# Altium PCB STM32F401RCT6最小系统板.PcbDoc
Units mil, origin at the board's own origin, x right, y up, seen from the top; angles counter-clockwise.
Board outline 2560 x 2610 mil, 2 copper layers (Top Layer, Bottom Layer); 73 components, 77 nets, 277 pads, 58 vias.
Unrouted connection lines stored in the file: 63.
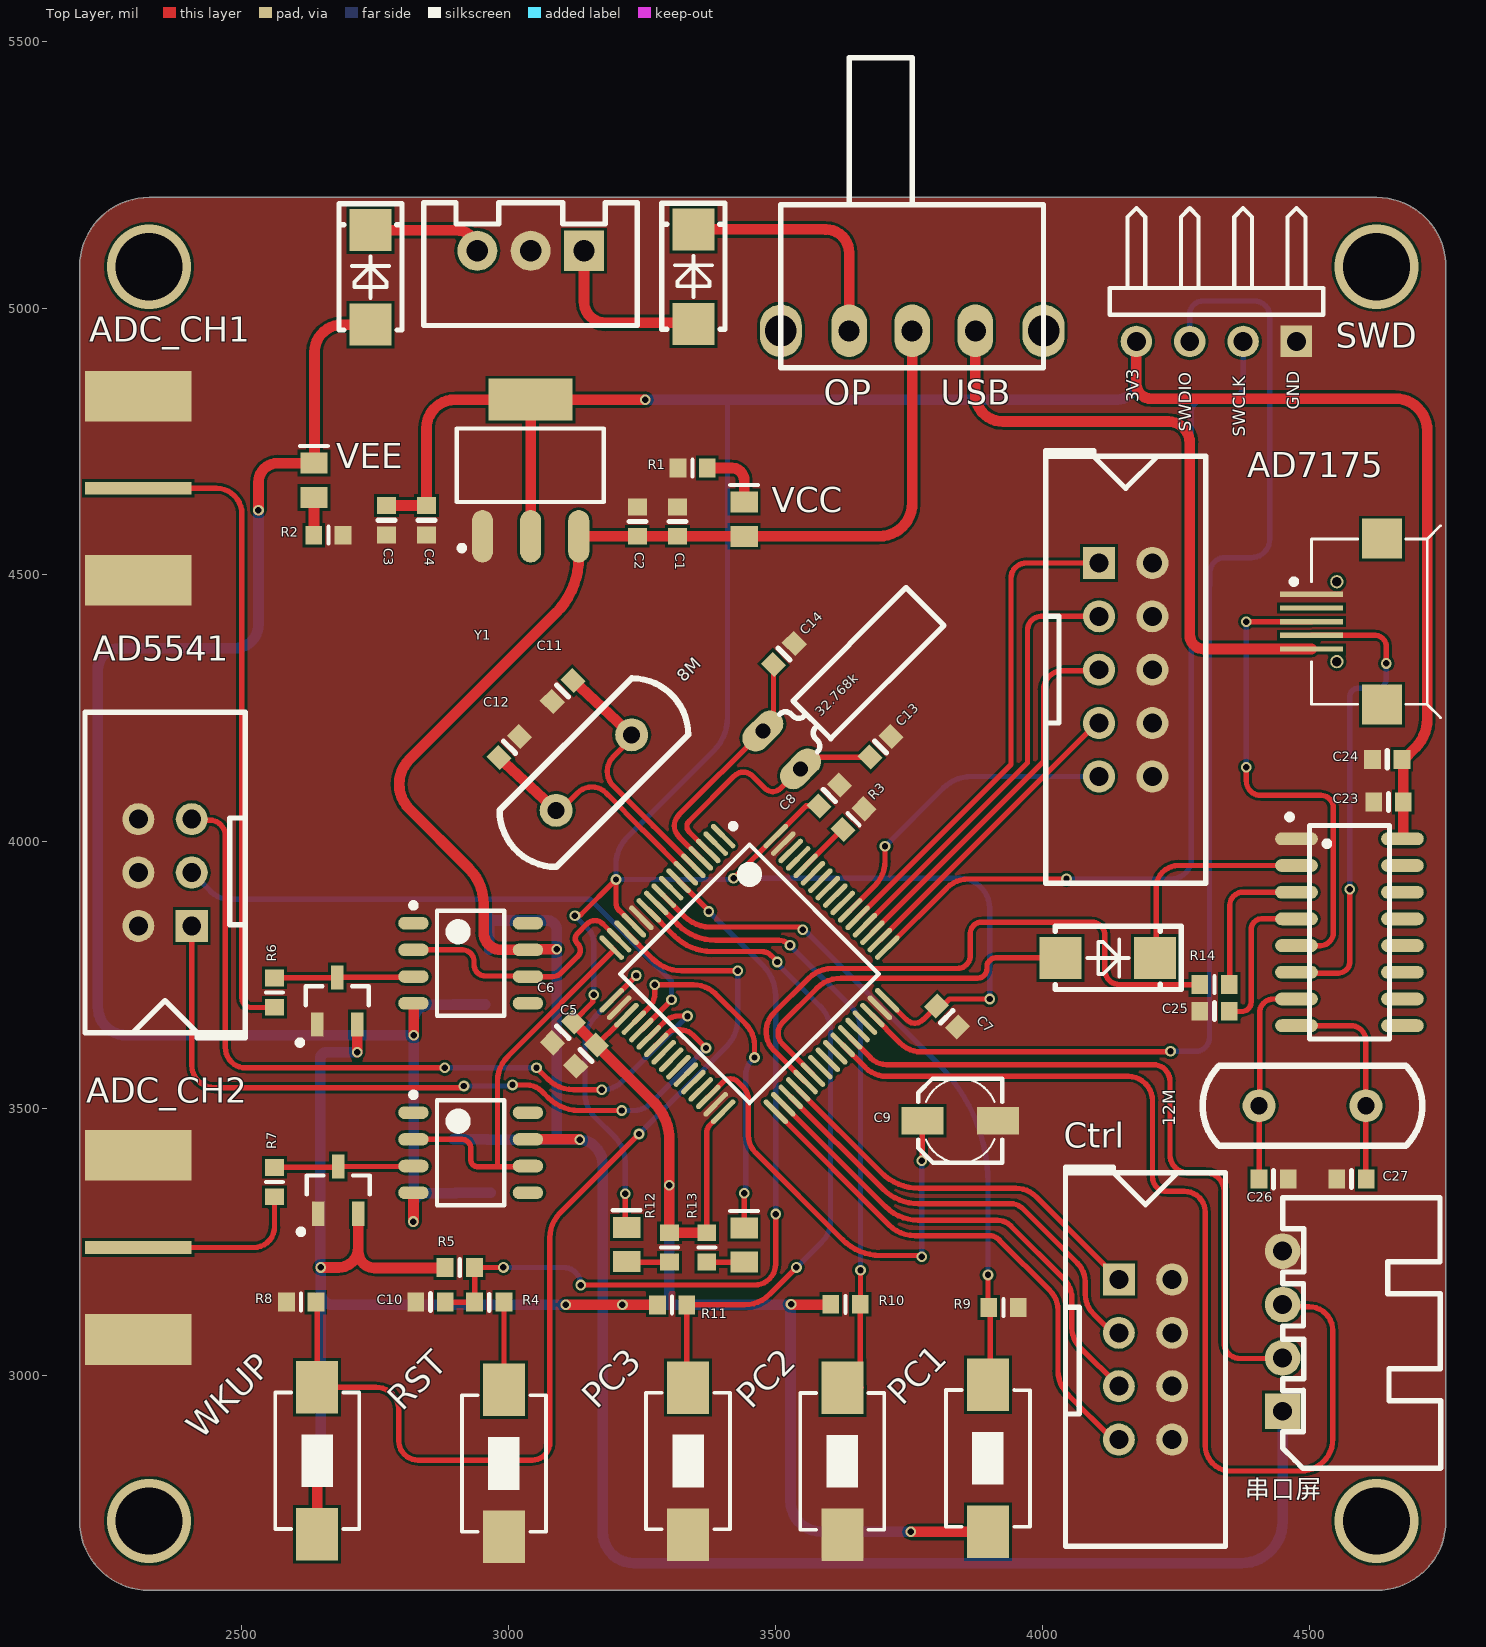
[diagram p0: Top Layer view]
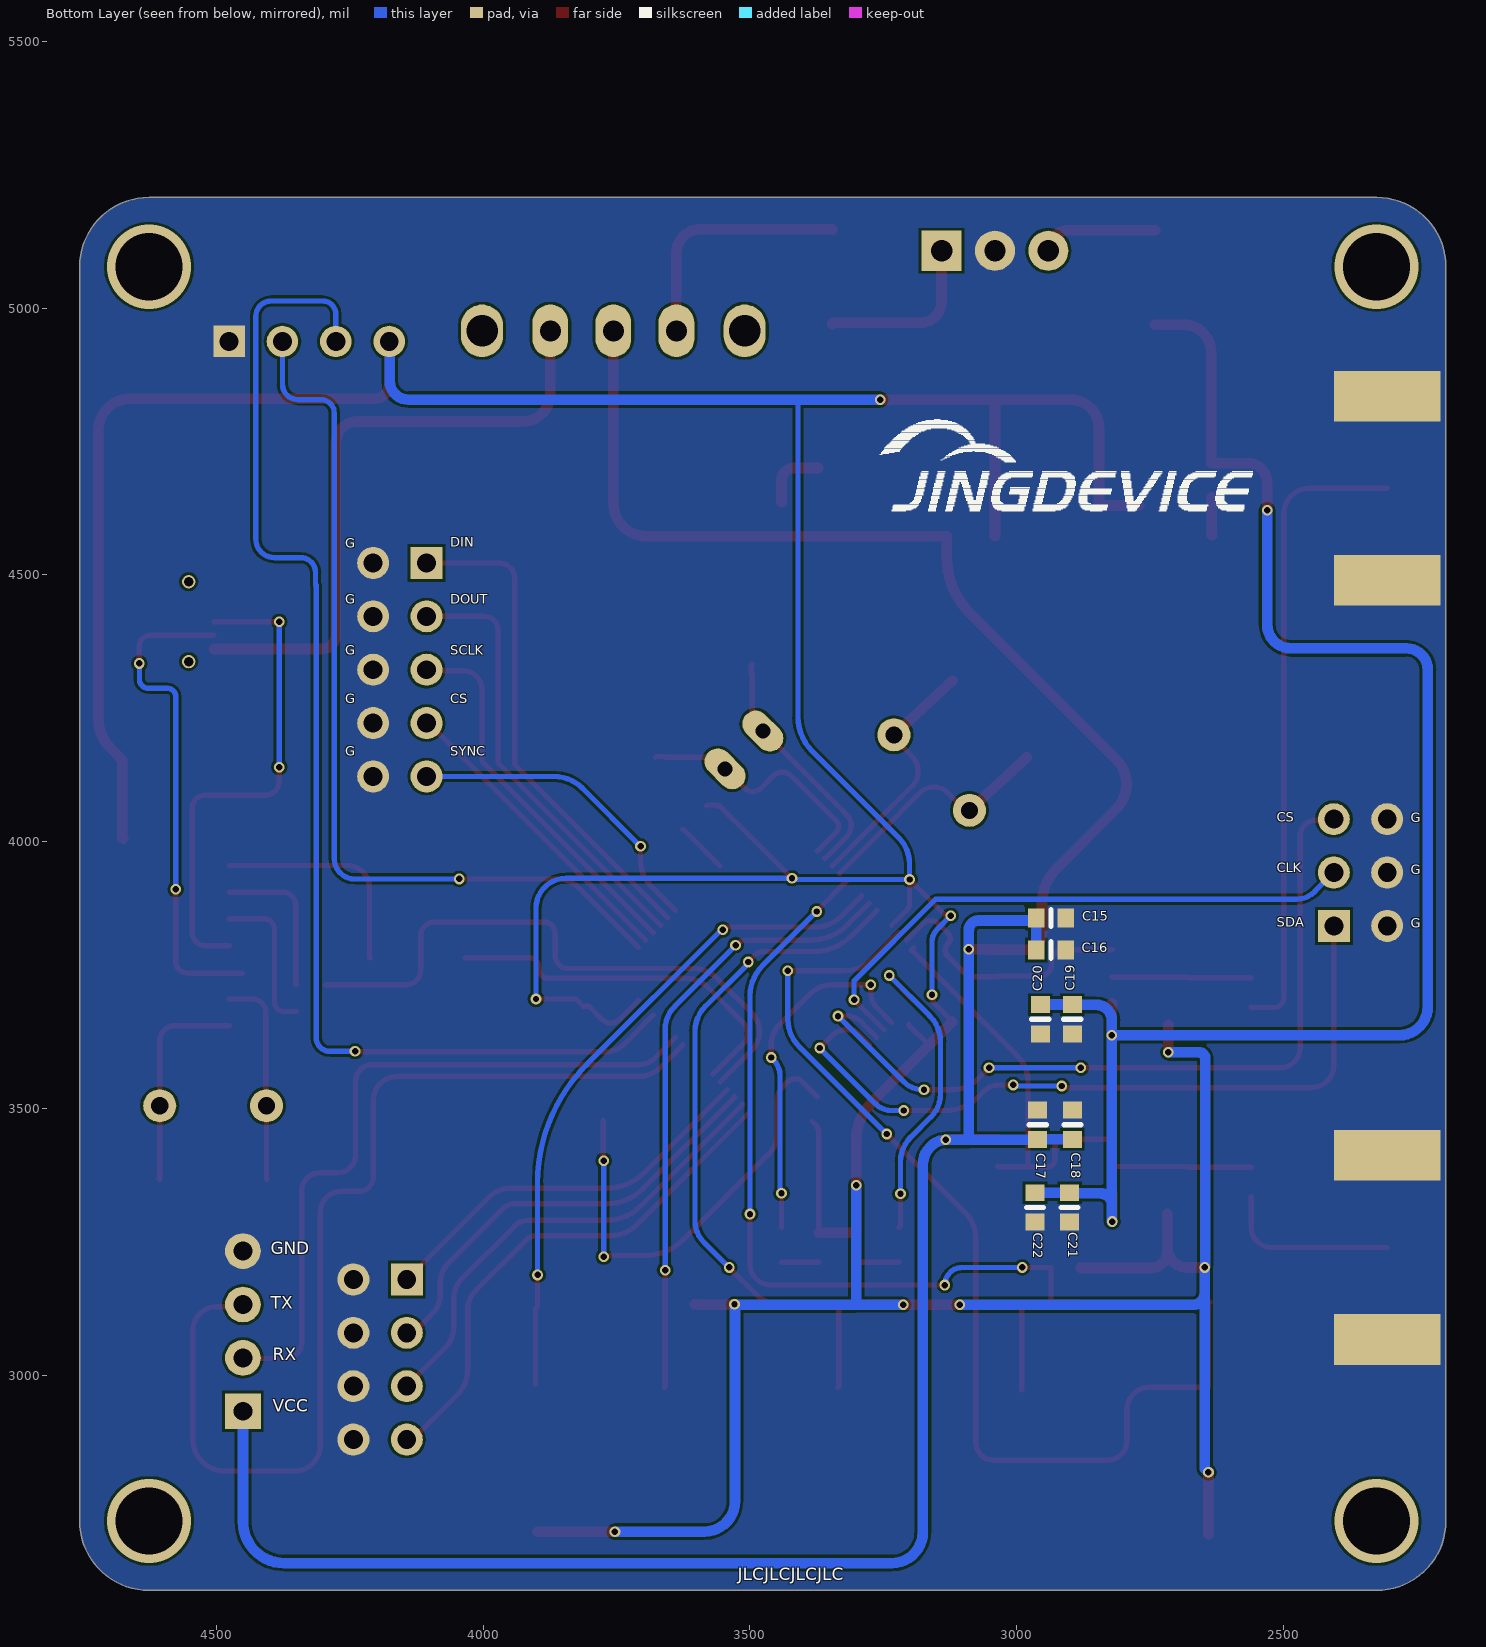
[diagram p1: Bottom Layer view, seen from below]
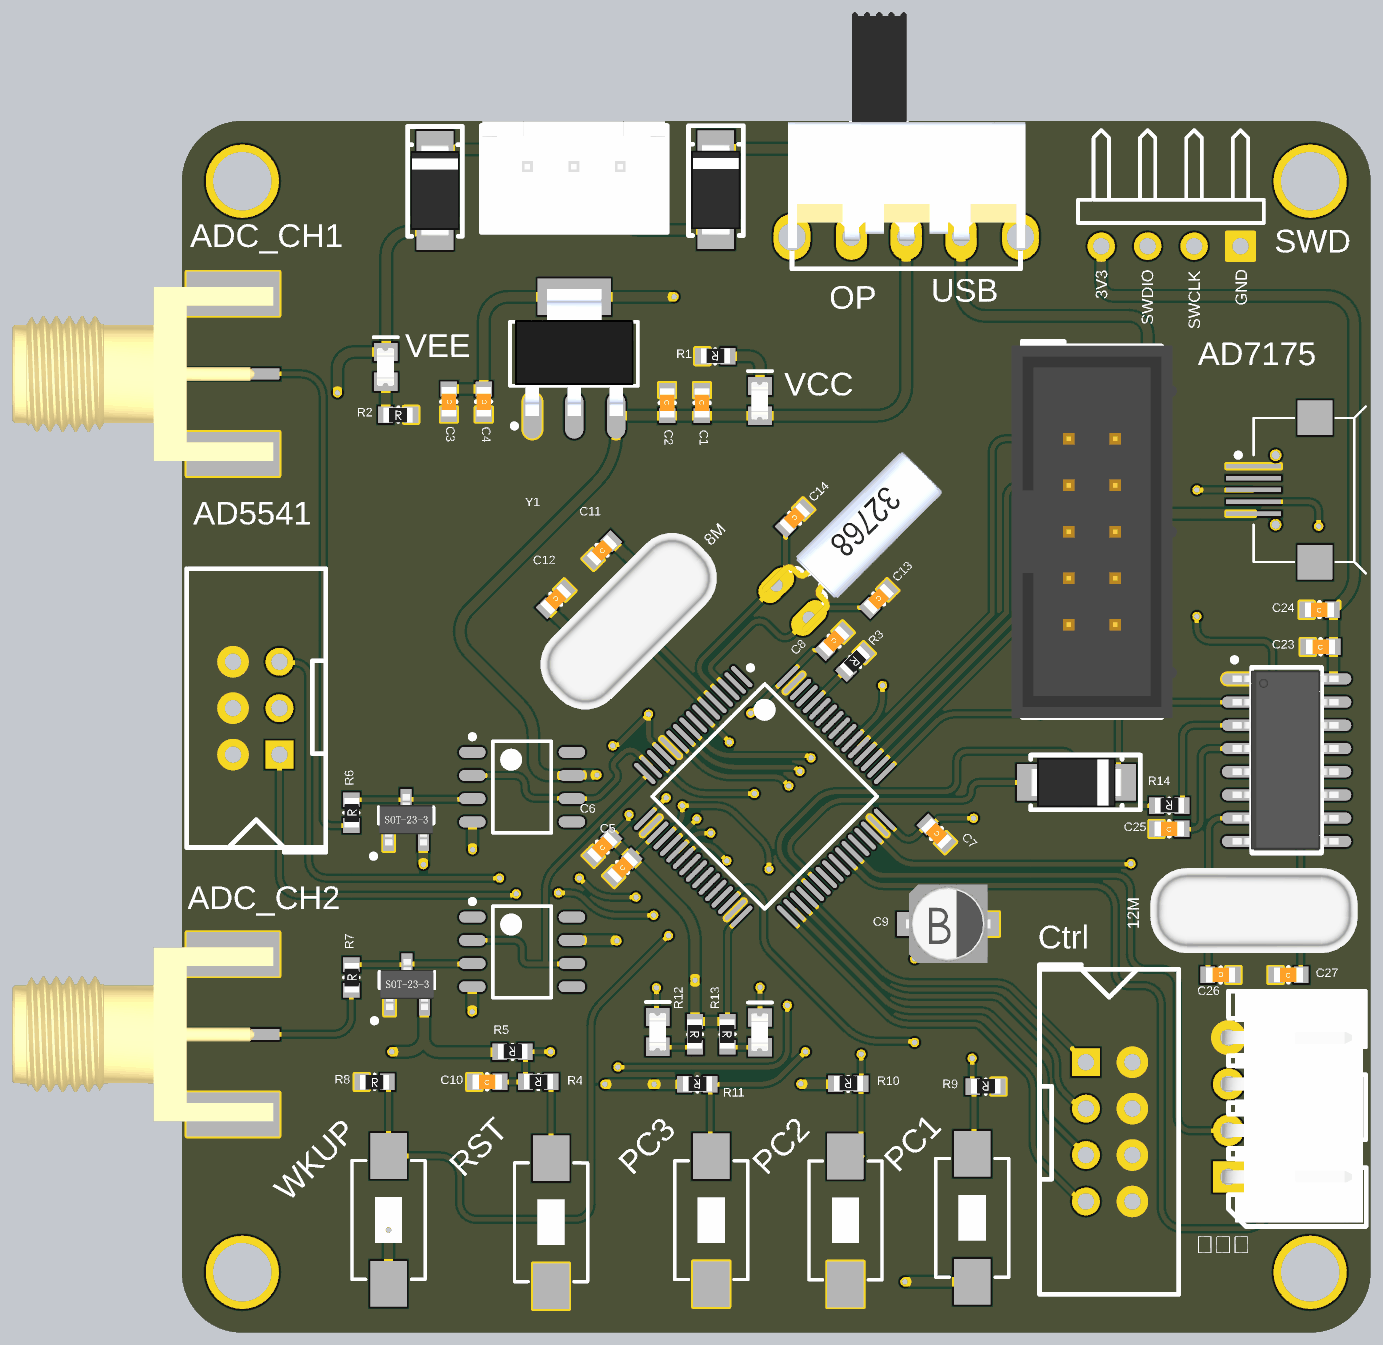
[diagram p2: 3D render of the assembled board from above, using the file's embedded part models]
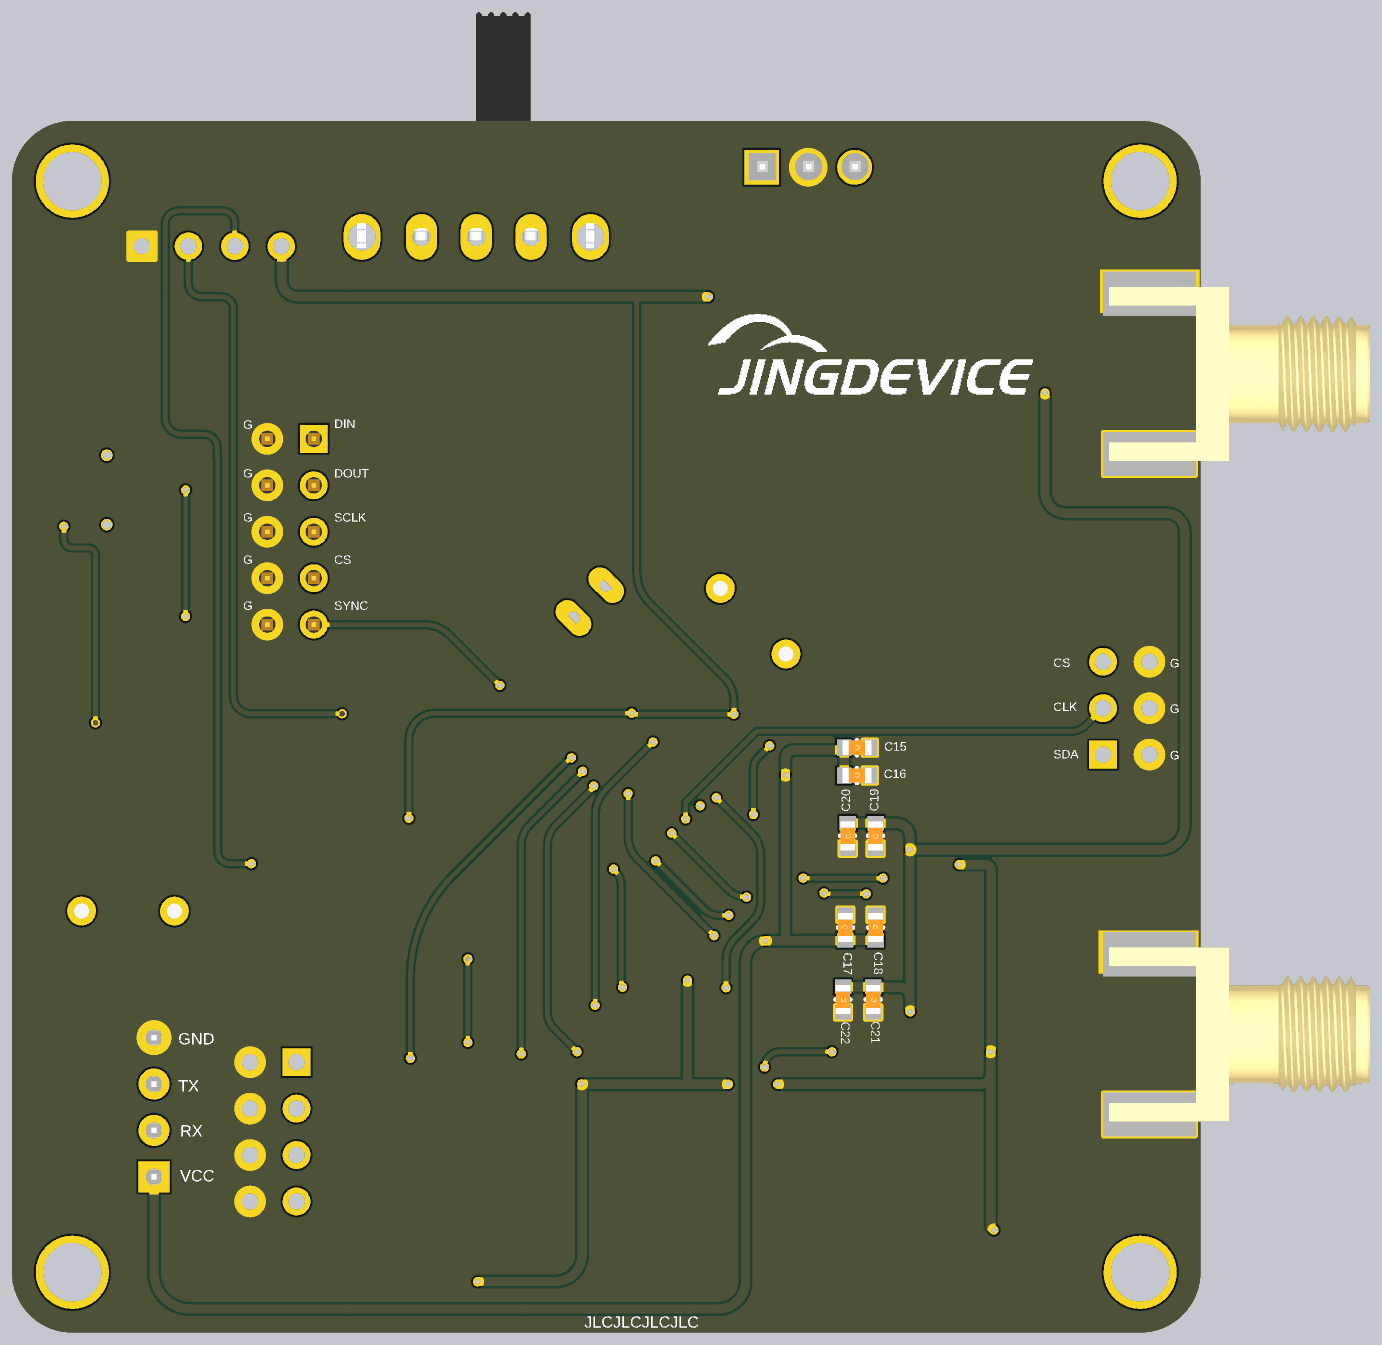
[diagram p3: 3D render of the assembled board from below, using the file's embedded part models]

## Layer stack, top to bottom
Top Solder: solder mask 0.4, Solder Resist, Dk 3.5
Top Layer: signal copper 1.4
Dielectric 1: dielectric 12.6, FR-4, Dk 4.8
Bottom Layer: signal copper 1.4
Bottom Solder: solder mask 0.4, Solder Resist, Dk 3.5

## Board outline
2325.94,2597.49 cw(c2325.94,2727.49) 2195.94,2727.49 2195.94,5077.49 cw(c2325.94,5077.49) 2325.94,5207.49 4625.94,5207.49 cw(c4625.94,5077.49) 4755.94,5077.49 4755.94,2727.49 cw(c4625.94,2727.49) 4625.94,2597.49

## Design rules (kind name [scope] priority, off if disabled: settings)
Clearance [All] p1: gap=5 ignorepadtopadclearanceinfootprint=FALSE except(0: Arc-Hole Track-Hole SMDPad-Hole THPad-Hole Via-Hole Fill-Hole Poly-Hole Region-Hole Text-Hole)
PolygonConnect [All] p1: connectstyle=Direct reliefconductorwidth=10 reliefentries=4 polygonreliefangle="90 Angle" airgapwidth=10
RoutingVias [All] p1: holewidth=28 width=50 viastyle="Through Hole" minholewidth=28 minwidth=50 maxholewidth=28 maxwidth=50
SolderMaskExpansion [All] p1: expansion=4 istentingtop=FALSE
Width [All] p1: maxlimit=100 minlimit=10 preferedwidth=10
30 further rules are at their usual default settings.

## Classes and differential pairs
component class USB-TTL: C23 C24 C25 C26 C27 R14
component class STM32F401RCT6最小系统板: AD5541 AD7175 C1 C2 C3 C4 C5 C6 C7 C8 C9 C10 C11 C12 C13 C14 R1 R2 R3 R4 R5 RST SWD Y1 串口屏
component class Keys: R8 R9 R10 R11 R12 R13 WKUP
component class Analog: ADC_CH1 ADC_CH2 C15 C16 C17 C18 C19 C20 C21 C22 R6 R7

## Components (designator, comment, footprint, x,y, rotation, side; value= is the part's Value field where it differs from the comment)
AD5541 "DC-6P" DC-6P 2350.94,4027.49 r90 top
AD7175 "DC-10P" DC-10P 4105.94,4322.49 r90 top
ADC_CH1 "SMA" SMA1 2305.94,4662.49 r0 top
ADC_CH2 "SMA" SMA1 2305.94,3239.99 r0 top
C1 "Cap-S" C0603-L 3315.94,4600.05 r270 top value=100nF
C2 "Cap-S" C0603-L 3240.94,4600.05 r270 top value=10uF
C3 "Cap-S" C0603-L 2770.94,4602.49 r90 top value=100nF
C4 "Cap-S" C0603-L 2845.94,4602.49 r90 top value=10uF
C5 "Cap-S" C0603-L 3144.94,3599.49 r45 top value=100nF
C6 "Cap-S" C0603-L 3101.45,3643.01 r45 top value=10uF
C7 "Cap-S" C0603-L 3820.94,3672.49 r135 top value=100nF
C8 "Cap-S" C0603-L 3600.43,4086.98 r225 top value=10uF
C9 "C" C-RB-SD4 3845.94,3477.49 r0 top value=4.7uF
C10 "Cap-S" C0603-L 2853.38,3137.49 r0 top value=100nF
C11 "Cap-S" C0603-L 3100.94,4282.49 r45 top value=20pF
C12 "Cap-S" C0603-L 3000.94,4177.49 r225 top value=20pF
C13 "Cap-S" C0603-L 3696.45,4178.01 r225 top value=10pF
C14 "Cap-S" C0603-L 3515.43,4351.98 r225 top value=10pF
C15 "Cap-S" C0603-L 2935.94,3857.49 r0 bottom value=100nF
C16 "Cap-S" C0603-L 2935.94,3797.49 r0 bottom value=10uF
C17 "Cap-S" C0603-L 2960.94,3470.05 r270 bottom value=100nF
C18 "Cap-S" C0603-L 2895.94,3470.05 r270 bottom value=10uF
C19 "Cap-S" C0603-L 2895.94,3667.49 r90 bottom value=100nF
C20 "Cap-S" C0603-L 2955.94,3667.49 r90 bottom value=10uF
C21 "Cap-S" C0603-L 2900.94,3314.93 r90 bottom value=100nF
C22 "Cap-S" C0603-L 2965.94,3314.93 r90 bottom value=10uF
C23 "Cap-S" C0603-L 4648.38,4074.49 r0 top value=100nF
C24 "Cap-S" C0603-L 4645.94,4154.49 r0 top value=10uF
C25 "Cap-S" C0603-L 4322.38,3682.49 r0 top value=10nF
C26 "Cap-S" C0603-L 4433,3368 r180 top value=22pF
C27 "Cap-S" C0603-L 4579,3368 r0 top value=22pF
Ctrl "DC-8P" DC-8P 4201,3038 r270 top
D1 "D" D-SMA 2740.94,5057.49 r90 top
D2 "D" D-SMA 3345.94,5058.91 r90 top
D3 "D" D-SMA 4122.36,3782.49 r0 top
J1 "Power-3P" SIPA03 3140.94,5107.49 r180 top
LED3 "LED" Led-0805_L 3220.94,3245.49 r90 top
LED4 "LED" Led-0805_L 3440.94,3244.49 r90 top
PC1 "SW-PB2" SW-PB2-SMD 3898,2847 r180 top (schematic designator S1)
PC2 "SW-PB2" SW-PB2-SMD 3625,2837 r0 top (schematic designator S2)
PC3 "SW-PB2" SW-PB2-SMD 3335.94,2837.49 r0 top (schematic designator S3)
R1 "R" R0603-L 3344.38,4700.49 r180 top value=1K
R2 "R" R0603-L 2661.94,4574.49 r0 top value=1K
R3 "R" R0603-L 3645.94,4042.49 r225 top value=10K
R4 "R" R0603-L 2963.5,3137.49 r180 top value=100R
R5 "R" R0603-L 2907.94,3202.49 r180 top value=10K
R6 "R" R0603-L 2560.94,3717.49 r90 top value=100R
R7 "R" R0603-L 2560.94,3362.49 r90 top value=100R
R8 "R" R0603-L 2610.94,3137.49 r0 top value=1K
R9 "R" R0603-L 3926.94,3127.49 r180 top value=1K
R10 "R" R0603-L 3630.94,3133.49 r180 top value=1K
R11 "R" R0603-L 3305.94,3132.49 r180 top value=1K
R12 "R" R0603-L 3300.94,3240.05 r270 top value=1K
R13 "R" R0603-L 3370.94,3240.05 r270 top value=1K
R14 "R" R0603-L 4322.38,3732.49 r180 top value=100
RST "SW-PB2" SW-PB2-SMD 2990.94,2837.49 r180 top
SWD "Header 4H" HDR1X4H 4475.94,4937.49 r180 top
U1 "STM32F401RCT6" STM-LQFP64_L 3450.94,3752.49 r315 top
U3 "OPA192" SOIC127P600X175-8N 2928.66,3772.49 r0 top
U4 "OPA192" SOIC127P600X175-8N 2928.66,3417.49 r0 top
U5 "BAT54S" SOT-23-3 2678.95,3702 r90 top
U6 "BAT54S" SOT-23-3 2680.94,3347.49 r90 top
U7 "CH340G" SOP-16 4575.94,3839.49 r0 top
U10 "AMS1117" SOT-223 3040.94,4697.49 r0 top
USB "USB_Mini/Micro" USB_Micro 4720.94,4412.49 r0 top
USB "SW-SPDT" SW-SPDT 3755.94,4957.49 r90 top (schematic designator POWER)
VCC "LED" Led-0805_L 3440.94,4604.49 r90 top (schematic designator LED1)
VEE "LED" Led-0805_L 2634.94,4677.49 r90 top (schematic designator LED2)
WKUP "SW-PB2" SW-PB2-SMD 2640.94,2842.49 r180 top
Y1 "XTAL" XTAL-PB2-DIP 3160.94,4142.49 r45 top value=8M
Y2 "XTAL" XTAL-32768 3475.94,4207.49 r315 top value=32.768K
Y3 "XTAL" XTAL-PB2-DIP 4515.94,3513.49 r0 top value=12M
串口屏 "Header 4" XH2.54-WI-4P 4450,3083 r90 top

## Footprints (in the part's own frame and the unit in brackets; to place one, negate y for a bottom-side part, rotate by r counter-clockwise, add the part's x,y. Pads: shape width x height; smd on the part's side, far side on the other; paste and mask are expansions set on the pad)
C0603-L [mm] "贴片电容0603 高密度"
  rect 0.8x0.9 smd: 1(-0.7,0) 2(0.7,0)
  silkscreen extent 0,-0.39 0,0.41, body extent -0.8,-0.4 0.8,0.41, height 0.88
C-RB-SD4 [mm] "贴片铝电解"
  rect 2x1.3 smd: 1(-1.8,0) 2(1.8,0)
  silkscreen extent -2,-2 2,2, body extent -2.29,-2.14 2.31,2.16, height 5.2
D-SMA [mm]
  rect 2x2 smd: 1(-2.25,0) 2(2.25,0)
  silkscreen extent -2.5,-1.5 3.5,1.5, body extent -2.5,-1.35 2.5,1.35, height 2.15
DC-6P [mil]
  rect 60x60 hole 35.43: 1(-185,-55)
  round 60 hole 35.43: 2(-85,-55) 3(15,-55) 4(15,45) 5(-85,45) 6(-185,45)
  silkscreen extent -395,-155 215,145, body extent -386,-156 216,145, height 236
DC-8P [mil]
  rect 60x60 hole 35.43: 1(-142,-58)
  round 60 hole 35.43: 2(-42,-58) 3(58,-58) 4(158,-58) 5(158,42) 6(58,42) 7(-42,42) 8(-142,42)
  silkscreen extent -352,-158 358,142, body extent -342,-159 358,142, height 236
DC-10P [mil]
  rect 60x60 hole 35.43: 1(200,0)
  round 60 hole 35.43: 2(100,0) 3(0,0) 4(-100,0) 5(-200,0) 6(-200,-100) 7(-100,-100) 8(0,-100) 9(100,-100) 10(200,-100)
  silkscreen extent -400,-200 410,100, body extent -401,-233 401,123, height 357
HDR1X4H [mm] "Connector; Header; 4 Position; Right Angle"
  rect 1.5x1.5 hole 0.9: 1(0,0)
  round 1.5 hole 0.9: 2(2.54,0) 3(5.08,0) 4(7.62,0)
  silkscreen extent -1.27,-6.35 8.89,-1.27
Led-0805_L [mm] "贴片LED0805-高密度"
  rect 1x1.3 smd: 1(-0.813,0) 2(0.813,0)
  silkscreen extent 1.63,-0.66 1.63,0.66, body extent -1.03,-0.44 1.03,0.47, height 0.85
R0603-L [mm] "贴片电阻0603 高密度"
  rect 0.8x0.9 smd: 1(-0.7,0) 2(0.7,0)
  silkscreen extent 0,-0.39 0,0.41, body extent -0.81,-0.43 0.79,0.39, height 0.53
SIPA03 [mil]
  rect 75x75 hole 40: 1(0,0)
  round 75 hole 40: 2(100,0) 3(200,0)
  silkscreen extent -100,-90 300,140, body extent -96,-99 298,137, height 276
SMA1 [mil]
  rect 200x24 smd: 1(0,0)
  rect 200x95 smd: 2(0,-172.5) 2(0,172.5)
  rect 200x95 smd far side: 2(0,-172.5)
  rect 200x95 smd far side mask+4: 2(0,172.5)
  body extent -475,-187 87,187, height 171
SOIC127P600X175-8N [mm] "SOIC, 8-Leads, Body 4.91x3.90mm, Pitch 1.27mm, IPC Medium Density"
  oval 1.45x0.6 smd: 1(-2.725,1.905) 2(-2.725,0.635) 3(-2.725,-0.635) 4(-2.725,-1.905) 5(2.725,-1.905) 6(2.725,-0.635) 7(2.725,0.635) 8(2.725,1.905)
  silkscreen extent -2.85,-2.5 1.6,2.88, body extent -2,-2.5 2,2.5, height 1.75
SOP-16 [mil]
  oval 80x24 smd: 1(-100,166.09) 2(-100,116.09) 3(-100,66.09) 4(-100,16.09) 5(-100,-33.91) 6(-100,-83.91) 7(-100,-133.91) 8(-100,-183.91) 9(98.5,-183.91) 10(98.5,-133.91) 11(98.5,-83.91) 12(98.5,-33.91) 13(98.5,16.09) 14(98.5,66.09) 15(98.5,116.09) 16(98.5,166.09)
  silkscreen extent -118,-209 74,212, body extent -117,-202 111,184, height 69
SOT-23-3 [mm]
  rect 1.15x0.6 smd: 1(-1.13,0.96) 2(1.12,0.01) 3(-1.13,-0.94)
  silkscreen extent -2.11,-1.49 0.69,1.91, body extent -1.4,-1.45 1.4,1.45, height 1.2
SOT-223 [mm]
  oval 1x2.5 smd: 1(-2.29,-3.175) 2(0,-3.175) 3(2.29,-3.175)
  rect 4x2 smd: 2(0,3.325)
  silkscreen extent -3.52,-3.86 3.48,1.96, body extent -3.25,-3.2 3.25,3.76, height 1.66
STM-LQFP64_L [mm] "Thin QFP, 64-Leads, Body 10x10mm, Pitch 0.5mm, IPC High Density"
  oval 1.55x0.25 smd: 1(-5.525,3.75) 2(-5.525,3.25) 3(-5.525,2.75) 4(-5.525,2.25) 5(-5.525,1.75) 6(-5.525,1.25) 7(-5.525,0.75) 8(-5.525,0.25) 9(-5.525,-0.25) 10(-5.525,-0.75) 11(-5.525,-1.25) 12(-5.525,-1.75) 13(-5.525,-2.25) 14(-5.525,-2.75) 15(-5.525,-3.25) 16(-5.525,-3.75) 33(5.525,-3.75) 34(5.525,-3.25) 35(5.525,-2.75) 36(5.525,-2.25) 37(5.525,-1.75) 38(5.525,-1.25) 39(5.525,-0.75) 40(5.525,-0.25) 41(5.525,0.25) 42(5.525,0.75) 43(5.525,1.25) 44(5.525,1.75) 45(5.525,2.25) 46(5.525,2.75) 47(5.525,3.25) 48(5.525,3.75)
  oval 0.25x1.55 smd: 17(-3.75,-5.525) 18(-3.25,-5.525) 19(-2.75,-5.525) 20(-2.25,-5.525) 21(-1.75,-5.525) 22(-1.25,-5.525) 23(-0.75,-5.525) 24(-0.25,-5.525) 25(0.25,-5.525) 26(0.75,-5.525) 27(1.25,-5.525) 28(1.75,-5.525) 29(2.25,-5.525) 30(2.75,-5.525) 31(3.25,-5.525) 32(3.75,-5.525) 49(3.75,5.525) 50(3.25,5.525) 51(2.75,5.525) 52(2.25,5.525) 53(1.75,5.525) 54(1.25,5.525) 55(0.75,5.525) 56(0.25,5.525) 57(-0.25,5.525) 58(-0.75,5.525) 59(-1.25,5.525) 60(-1.75,5.525) 61(-2.25,5.525) 62(-2.75,5.525) 63(-3.25,5.525) 64(-3.75,5.525)
  silkscreen extent -5.65,-4.35 4.35,4.55, body extent -5,-5 5,5, height 1.6
SW-PB2-SMD [mm] "贴片2脚微动开关"
  rect 2x2.5 smd: 1(0,3.556) 2(0,-3.444)
  silkscreen extent -2,-3.19 2,3.31, body extent -1.93,-3.94 1.92,3.95, height 2.5
SW-SPDT [mm] "侧卧拨动开关"
  oval 2.5x1.7 hole 1: 1(0,3) 2(0,0) 3(0,-3)
  oval 2.5x2 hole 1.5: 4(0,-6.25) 4(0,6.25)
  silkscreen extent -1.75,-6.25 13,6.25, body extent -0.61,-6.52 12.29,6.48, height 5.75
USB_Micro [mm] "5P 贴片 带定位柱"
  rect 3x0.25 smd: 1(-5.508,-1.3) 2(-5.508,-0.65) 3(-5.508,0) 4(-5.508,0.65) 5(-5.508,1.3)
  rect 1.9x1.9 smd: 6(-2.15,-3.95) 6(-2.15,3.95)
  round 0.635 hole 0.457 unplated: MH1(-4.3,1.9) MH2(-4.3,-1.9)
  silkscreen extent -6.47,-4.57 0.63,4.57
XH2.54-WI-4P [mm] "接插件，4P"
  rect 1.7x1.7 hole 0.9: 1(-3.81,0)
  round 1.7 hole 0.9: 2(-1.27,0) 3(1.27,0) 4(3.81,0)
  silkscreen extent -6.53,-7.53 6.35,0, body extent -6.31,-7.35 6.31,0.35, height 5.73
XTAL-32768 [mil]
  oval 50x88 hole 28: 1(0,0) 2(100,0)
  silkscreen extent 0,45 100,380, body extent -18,-28 118,396, height 126
XTAL-PB2-DIP [mil]
  round 62 hole 32: 1(-110,-8) 2(90,-8)
  silkscreen extent -216,-83 196,67, body extent -234,-99 212,85, height 142

## Part data
C1 C2 C3 C4 C5 C6 C7 C8 C10 C11 C12 C13 C14 C15 C16 C17 C18 C19 C20 C21 C22 C23 C24 C25 C26 C27: "贴片瓷片电容"
C9: library part Cap-Pol-ES, "极性贴片电解电容"
D1 D2 D3: library part Diode, "二极管"
J1: "供电端子"
LED3 LED4 VCC VEE: "发光二极管"
PC1 PC2 PC3 RST WKUP: "贴片式2脚微动开关"
R1 R2 R3 R4 R5 R6 R7 R8 R9 R10 R11 R12 R13 R14: library part Res, "贴片电阻"
SWD: "Header, 4-Pin, Right Angle", LatestRevisionDate=17-Jul-2002, LatestRevisionNote="Re-released for DXP Platform.", Publisher="Altium Limited"
U1: "ARM Cortex-M4 32-bit MCU+FPU, 105 DMIPS, 256 kB Flash, 64 kB Internal RAM, 48 I/Os, 64-pin LQFP, -40 to 85 degC, Tray", I/Os (High Current)=48, Manufacturer=STMicroelectronics, Operating Frequency(F) (Processor speed) (MHz)=84, Supplier Part Number 1=497-14047-ND, Supply Voltage(Vcc) max (V)=3.6, Supply Voltage(Vcc) min (V)=1.8, ComponentLink1Description="Manufacturer URL", ComponentLink1URL=http://www.st.com/web/en/home.html, ComponentLink2Description=Datasheet, ComponentLink2URL=http://www.st.com/st-web-ui/static/active/en/resource/technical/document/data_brief/DM00071938.pdf, ComponentLink3Description="Package Specification", ComponentLink3URL=http://www.st.com/st-web-ui/static/active/en/resource/technical/document/datasheet/DM00037051.pdf, Core="ARM Cortex-M4", DatasheetVersion="Rev. 1", FLASH Size (Prog) (kB)=256, Internal RAM Size (kB)=64, Mounting Technology="Surface Mount", PackageDescription="64-Pin Low Profile Quad Flat Package, 10 x 10 mm Body, 0.5 mm Pitch", PackageReference=LQFP64, PackageVersion="Rev. 4, 06/2013", Packing=Tray, PartNumber=STM32F401RCT6, Supplier 1=Digi-Key, Supplier 2=Newark, Supplier 3=Mouser, Supplier Part Number 2=19X6221, Supplier Part Number 3=511-STM32F401RCT6
U7: "SOP16"
USB: library part USB, "Mini/Micro USB母口"
USB: "SPDT Subminiature Toggle Switch, Right Angle Mounting, Vertical Actuation", ComponentLink1Description="Manufacturer Link", ComponentLink1URL=http://www.apem.com
Y1 Y2 Y3: "晶振"
串口屏: "Header, 4-Pin", LatestRevisionDate=17-Jul-2002, LatestRevisionNote="Re-released for DXP Platform.", Publisher="Altium Limited"

## Via types
v1: diameter 20, hole 12, Top Layer to Bottom Layer, 54 vias
v2: diameter 157.48, hole 125.98, Top Layer to Bottom Layer, 4 vias

## Nets (pads, with @x,y where several pads share a name; then routed paths per layer and width w, separated by ;. In a path a pad name is that pad's centre, name@x,y a point inside that pad or via, vN(x,y) a via of type N, cw(c..) or ccw(c..) an arc to the next point about the centre after c; other vN are vias at no path point)
3V3: C3.2 C4.2 C5.2 C6.2 C7.2 C8.2 C23.2 C24.2 PC1.1 R5.2 R10.2 R11.2 R12.1 R13.1 SWD.4 U1.13 U1.19 U1.32 U1.48 U1.64 U5.3 U6.3 U7.16 U10.2 WKUP.1 | length 10339.7
  Top Layer w10: C6.2 3120.94,3663.49 3157.26,3699.82 3157.26,3711.82 v1(3158.94,3713.49) ; v1(3123.94,3861.49) 3125.85,3863.41 3134.85,3863.41 v1(3200.94,3929.49) 3200.94,3903.36 3200.94,3884.72 ccw(c3219.05,3884.72) 3206.25,3871.91 U1.13 ; C5.2@3164.45,3618.98 3167.43,3618.98 3167.43,3621.98 U1.19@3202.59,3657.15 ; R13.1 3370.94,3454.94 cw(c3392.09,3454.94) 3377.13,3469.89 U1.32@3383.33,3476.09 ; v1(3421.19,3931.74) 3421.4,3931.74 U1.64 3557.15,4067.49 3562.96,4067.49 3564.35,4068.89 3579.55,4068.89 C8.2 ; U1.48 3745.73,3666.49 ccw(c3760.84,3681.6) 3775.94,3666.49 3801.43,3691.98 3812.41,3691.98 3825.92,3705.49 v1(3900.94,3705.49)
  Top Layer w20: WKUP.1 v1(2640.94,2818.49) ; v1(2647.94,3202.49) 2680.94,3202.49 ccw(c2680.94,3239.49) 2717.93,3239.49 ; v1(2715.94,3605.49) U5.3 ; U6.3 2717.93,3239.49 ; C3.2 C4.2 2845.94,4775.49 cw(c2898.85,4775.49) 2898.85,4828.4 U10.2@3040.94,4828.4 ; R5.2 cw(c2879.38,3202.49) 2879.38,3201.49 2748.94,3201.49 cw(c2748.94,3232.5) 2717.93,3232.5 2717.93,3239.49 ; U10.2@3040.94,4572.49 U10.2@3040.94,4828.4 ; v1(3106.94,3132.49) v1(3212.94,3132.49) R11.2 ; C6.2 3164.45,3618.98 3271.65,3511.76 cw(c3200.94,3441.05) 3300.94,3441.05 v1(3300.94,3356.49) R12.1 R13.1 ; v1(3255.94,4828.49) 3255.94,4828.4 U10.2@3040.94,4828.4 ; v1(3528.94,3133.49) 3529.94,3132.49 3597.63,3132.49 3598.63,3133.49 R10.2 ; v1(3753,2707) PC1.1 ; SWD.4 4175.94,4857.49 ccw(c4202.94,4857.49) 4202.94,4830.49 4660.94,4830.49 cw(c4660.94,4770.49) 4720.94,4770.49 4720.94,4230.31 cw(c4644.12,4230.31) 4698.45,4176.01 4675.94,4153.49 4675.94,4007.08 U7.16
  Bottom Layer w10: v1(3123.94,3861.49) 3148.57,3836.87 cw(c3123.53,3811.83) 3158.94,3811.83 v1(3158.94,3713.49) ; 3409.94,4828.49 3409.94,4233.86 cw(c3319.72,4233.86) 3383.52,4170.07 3221.45,4008 ccw(c3270.95,3958.49) 3200.94,3958.51 v1(3200.94,3929.49) 3418.94,3929.49 v1(3421.19,3931.74) 3844.69,3931.74 cw(c3844.69,3875.49) 3900.94,3875.49 v1(3900.94,3705.49)
  Bottom Layer w20: v1(2640.94,2818.49) 2647.94,2825.49 2647.94,3154.49 ; v1(2715.94,3605.49) 2658.66,3605.49 ccw(c2658.66,3593.78) 2646.94,3593.78 2646.94,3543.49 2646.94,3208.74 ccw(c2666.94,3208.74) v1(2647.94,3202.49) 2647.94,3154.49 ; v1(3106.94,3132.49) 2669.94,3132.49 cw(c2669.94,3154.49) 2647.94,3154.49 ; v1(3212.94,3132.49) 3300.94,3132.49 ; v1(3255.94,4828.49) 3409.94,4828.49 4139.94,4828.49 ccw(c4139.94,4863.49) 4174.94,4863.49 4174.94,4936.49 SWD.4 ; v1(3300.94,3356.49) 3300.94,3132.49 ; v1(3528.94,3133.49) ccw(c3528.94,3132.49) v1@3527.94,3132.49 ; v1@3753,2707.49 3585.68,2707.49 cw(c3585.6,2765.15) 3527.94,2765.26 v1@3527.94,3132.49 ; 3300.94,3132.49 v1@3527.94,3132.49
ADC_CH1: U1.15 U3.2 U3.6 | length 503
  Top Layer w10: U3.2 2912.94,3797.49 cw(c2912.94,3775.49) 2934.94,3775.49 2934.94,3769.49 ccw(c2955.94,3769.49) 2955.94,3748.49 3034.94,3748.49 cw(c3034.94,3747.49) U3.6 3081,3747.49 ccw(c3081,3772.81) 3098.9,3754.91 3129.08,3785.09 ccw(c3117.18,3796.99) 3129.08,3808.89 3128.38,3809.6 cw(c3137.54,3818.76) 3128.38,3827.93 3146.94,3846.49 cw(c3161.46,3831.97) 3175.99,3846.49 U1.15
ADC_CH2: U1.16 U4.2 U4.6 | length 753.8
  Top Layer w10: U4.2 2911.94,3442.49 cw(c2911.94,3425.49) 2928.94,3425.49 2928.94,3403.49 ccw(c2940.94,3403.49) 2940.94,3391.49 2978.94,3391.49 ; 2978.94,3551.51 2978.94,3391.49 ; 2978.94,3551.54 cw(c3044.1,3551.51) 2998.02,3597.58 3197.49,3797.04 3197.49,3797.15 U1.16 ; U4.6 cw(c3034.94,3392.49) 3034.94,3391.49 2978.94,3391.49
BOOT0: R3.2 U1.60 | length 98.6
  Top Layer w10: U1.60 3624.02,4023.01 R3.2
D+: U7.5 USB.3@4504.09,4412.49 | length 928.2
  Top Layer w10: v1(4381.94,4412.49) USB.3@4504.09,4412.49 ; v1(4382,4140) 4382,4114 ccw(c4409,4114) 4409,4087 4522,4087 cw(c4522,4064) 4545,4064 4545,3830 cw(c4520.59,3830) 4520.59,3805.59 U7.5
  Bottom Layer w10: v1@4381.94,4141 v1(4381.94,4412.49)
D-: U7.6 USB.2@4504.09,4386.9 | length 934.1
  Top Layer w10: U7.6@4450.99,3754 4554,3754 ccw(c4554,3776) 4576,3776 v1(4576,3911) ; USB.2@4504.09,4386.9 4623.25,4386.9 cw(c4623.25,4365.95) 4644.2,4365.95 v1(4644.2,4334.23)
  Bottom Layer w10: v1(4576,3911) 4576,4272.43 4575.94,4272.49 cw(c4590.94,4272.49) 4590.94,4287.49 4626.94,4287.49 ccw(c4626.94,4304.49) 4643.94,4304.49 4643.94,4334.23 v1(4644.2,4334.23)
GND: AD5541.4 AD5541.5 AD5541.6 AD7175.6 AD7175.7 AD7175.8 AD7175.9 AD7175.10 ADC_CH1.2 ADC_CH2.2 C1.1 C2.1 C3.1 C4.1 C5.1 C6.1 C7.1 C8.1 C9.2 C10.1 C11.1 C12.1 C13.1 C14.1 C15.1 C16.1 C17.1 C18.1 C19.1 C20.1 C21.1 C22.1 C23.1 C24.1 C25.1 C26.1 C27.1 Ctrl.5 Ctrl.6 Ctrl.7 Ctrl.8 J1.2 PC2.2 PC3.2 R1.2 R2.2 R3.1 R8.1 R9.1 RST.1 SWD.1 U1.12 U1.18 U1.31 U1.47 U1.63 U5.1 U6.1 U7.1 U10.1 USB.5 串口屏.4
GPIO_LED1: LED3.2 U1.17 | length 601.3
  Top Layer w10: U1.17 3238.94,3749.29 v1(3238.94,3749.49) ; v1(3217.94,3340.31) 3217.94,3280.49 LED3.2
  Bottom Layer w10: v1(3217.94,3340.31) 3217.94,3400.18 ccw(c3152.01,3400.18) 3198.63,3446.8 3160.6,3484.84 cw(c3203.22,3527.46) 3142.94,3527.43 3142.94,3625.41 cw(c3210.74,3625.41) 3162.8,3673.35 v1(3238.94,3749.49)
GPIO_LED2: LED4.2 U1.20 | length 676.4
  Top Layer w10: U1.20 3262.45,3689.28 ccw(c3235.37,3716.36) 3273.67,3716.3 ccw(c3235.37,3716.36) 3273.67,3716.36 v1(3273.67,3732.22) 3346.16,3732.22 cw(c3346.16,3674.15) 3387.22,3715.21 3443.98,3658.45 cw(c3404.53,3618.99) 3460.33,3619.06 cw(c3404.53,3618.99) 3460.33,3618.99 v1(3460.33,3595.88) ; LED4.2 v1(3440.94,3341.49)
  Bottom Layer w10: v1(3440.94,3341.49) 3442.85,3343.41 3442.85,3350.48 3443.74,3351.37 3443.74,3562.11 ; 3443.75,3562.15 cw(c3485.24,3562.11) 3455.9,3591.45 v1(3460.33,3595.88)
KEY_S1: PC1.2 R9.2 U1.9 | length 1266.2
  Top Layer w10: U1.9 3329.1,3860.42 ccw(c3377.2,3908.51) 3377.2,3840.49 3379.4,3840.49 3527.89,3840.49 3538.87,3840.49 cw(c3538.87,3823.42) v1(3550.94,3835.49) ; R9.2@3897.94,3128.93 v1(3897.94,3188.49) ; PC1.2@3901.94,2983.09 R9.2@3901.94,3124.93
  Bottom Layer w10: v1(3550.94,3835.49) 3550.94,3837.49 3805.92,3582.51 3805.99,3582.45 cw(c3583.65,3360.31) 3897.94,3360.31 v1(3897.94,3188.49)
KEY_S2: PC2.1 R10.1 U1.10 | length 1159.3
  Top Layer w10: U1.10 3316.89,3844.78 ccw(c3387.6,3915.49) 3387.6,3815.49 3402.03,3815.49 3505.97,3815.49 cw(c3505.97,3786.59) 3519.39,3812.19 cw(c3505.97,3786.59) 3526.41,3807.03 v1(3526.94,3806.49) ; R10.1@3658.5,3131.49 3658.5,2979.94 ccw(c3660.94,2979.93) PC2.1@3660.94,2977.49 ; R10.1 3659.94,3134.93 3658.94,3135.93 v1(3658.94,3197.49)
  Bottom Layer w10: v1(3526.94,3806.49) 3526.94,3805.49 3641.18,3691.25 cw(c3598.31,3648.38) 3658.94,3648.38 v1(3658.94,3197.49)
KEY_S3: PC3.1 R11.1 U1.11 | length 1298.8
  Top Layer w10: U1.11 3310.05,3823.78 ccw(c3380.77,3894.49) 3380.77,3794.49 3474.05,3794.49 cw(c3474.05,3770.6) 3490.94,3787.5 3503.05,3775.39 v1(3503.05,3774.89) ; PC3.1 cw(c3335.94,2979.93) 3333.5,2979.93 R11.1 3441.62,3132.49 ; 3441.67,3132.49 ccw(c3441.62,3198.44) 3488.26,3151.81 v1(3538.94,3202.49)
  Bottom Layer w10: v1(3503.05,3774.89) 3503.05,3772.39 3583.48,3691.95 cw(c3536.51,3644.98) 3602.94,3644.98 3602.94,3289.03 ; v1(3538.94,3202.49) 3587.01,3250.56 ccw(c3548.54,3289.03) 3602.94,3288.99
NetADC_CH1_1: ADC_CH1.1 R6.1 | length 1199.9
  Top Layer w10: ADC_CH1.1 2451.94,4662.49 cw(c2451.94,4614.49) 2499.94,4614.49 2499.94,3707.49 ccw(c2517.94,3707.49) 2517.94,3689.49 2560.5,3689.49 R6.1
NetADC_CH2_1: ADC_CH2.1 R7.1 | length 333.4
  Top Layer w10: ADC_CH2.1 2522.39,3239.99 ccw(c2522.45,3278.49) 2560.94,3278.43 2560.94,3278.51 R7.1
NetC9_1: C9.1 U1.30 | length 853.8
  Top Layer w10: U1.30 3401.65,3550.09 cw(c3415.5,3536.25) 3429.34,3550.09 3439.14,3540.29 cw(c3415.49,3516.64) 3448.94,3516.64 3448.94,3449.96 ccw(c3494.56,3449.96) 3462.3,3417.7 3625.71,3254.29 ccw(c3696.42,3325) 3696.42,3225 v1@3775,3225 ; v1@3775,3405 3774.94,3405.06 3774.94,3477.49 C9.1
  Bottom Layer w10: v1(3773.94,3222.49) v1(3773.94,3402.49)
NetC25_2: C25.2 U7.4 | length 283.9
  Top Layer w10: C25.2 4349.94,3682 4373,3682 ccw(c4373,3700) 4391,3700 4391,3836 cw(c4410.59,3836) 4410.59,3855.59 U7.4
NetC26_2: C26.2 U7.7 Y3.1 | length 396.5
  Top Layer w10: C26.2 4405.94,3368 Y3.1 4407,3506.55 4407,3680 cw(c4432.59,3680) 4432.59,3705.59 U7.7
NetC27_2: C27.2 U7.8 Y3.2 | length 407.5
  Top Layer w10: U7.8 4577.41,3655.59 cw(c4577.41,3627) 4606,3627 4606,3505.49 Y3.2 4605.94,3368 C27.2 ; Y3.2@4590,3506.43 ccw(c4590.94,3506.43) Y3.2@4590.94,3505.49
NetD1_2: D1.2 J1.3 | length 222
  Top Layer w20: D1.2 2902.36,5146.08 cw(c2902.36,5107.49) J1.3
NetD2_1: D2.1 J1.1 | length 324.1
  Top Layer w20: J1.1 3140.94,5012.49 ccw(c3180.94,5012.49) 3180.94,4972.49 3343.78,4972.49 cw(c3343.78,4970.33) D2.1
NetD3_2: D3.2 U7.2 | length 419.4
  Top Layer w10: D3.2 ccw(c4210.94,3784.55) 4213,3784.55 4213,3914 cw(c4254.59,3914) 4254.59,3955.59 U7.2
NetLED1_2: R1.1 VCC.2 | length 123.1
  Top Layer w20: R1.1 3417.94,4700.49 cw(c3417.94,4677.49) 3440.94,4677.49 VCC.2
NetLED2_1: R2.1 VEE.1 | length 71.6
  Top Layer w20: R2.1 2634.94,4574.49 VEE.1
NetLED3_1: LED3.1 R12.2 | length 80.6
  Top Layer w10: LED3.1 ccw(c3221.94,3213.49) 3221.94,3212.49 R12.2
NetLED4_1: LED4.1 R13.2 | length 70
  Top Layer w10: R13.2 LED4.1
NetR4_1: R4.1 RST.2 | length 164.5
  Top Layer w10: RST.2 2990.94,3137.49 R4.1
NetR6_2: R6.2 U3.3 U5.2 | length 261.8
  Top Layer w10: R6.2 2677.52,3745.05 ccw(c2677.52,3746.08) U5.2 2819.96,3746.08 ccw(c2819.96,3747.49) U3.3
NetR7_2: R7.2 U4.3 U6.2 | length 261.8
  Top Layer w10: R7.2 2679.01,3390.05 ccw(c2679.01,3391.57) U6.2 2820.45,3391.57 ccw(c2820.45,3392.49) U4.3
NetR14_1: R14.1 U7.3 | length 288.1
  Top Layer w10: R14.1 ccw(c4349.94,3733.55) 4351,3733.55 4351,3881 cw(c4375.59,3881) 4375.59,3905.59 U7.3
NRST: C10.2 R4.2 R5.1 U1.7 | length 1513.8
  Top Layer w10: C10.2 R4.2 R5.1@2935.94,3202.49 ; R5.1 R5.1@2935.94,3202.49 ; v1(2989.94,3202.49) R5.1@2935.94,3202.49 ; v1(3134.94,3169.49) 3460.51,3169.49 ccw(c3460.55,3208.88) 3499.94,3208.85 3499.94,3208.95 v1(3499.94,3302.49) ; U1.7 v1@3373.94,3871.25
  Bottom Layer w10: v1(2989.94,3202.49) 3101.94,3202.49 cw(c3101.94,3169.49) v1(3134.94,3169.49) ; v1(3374.94,3869.49) 3476.22,3768.22 cw(c3418.94,3710.94) 3499.94,3710.94 v1(3499.94,3302.49)
OSC32_IN: C13.2 U1.3 Y2.2 | length 489.2
  Top Layer w10: U1.3 3338.13,4018.42 cw(c3348.49,4028.79) 3338.13,4039.15 3422.33,4123.35 cw(c3439.5,4106.17) 3456.68,4123.35 3479.81,4100.22 ccw(c3494.66,4115.07) 3509.51,4100.22 3546.36,4137.07 Y2.2 3557.48,4136.78 3579.21,4158.52 3658.98,4158.52 3660.37,4159.91 3675.57,4159.91 C13.2
OSC32_OUT: C14.2 U1.4 Y2.1 | length 459.8
  Top Layer w10: U1.4 3318.35,4010.36 cw(c3338.13,4030.13) 3318.35,4049.91 Y2.1 3495.94,4227.49 3495.94,4314.51 3497.33,4315.9 3497.33,4331.1 C14.2
OSC_IN: C11.2 U1.5 Y1.2 | length 477.6
  Top Layer w10: Y1.2 3230.24,4193.79 3195.94,4159.49 ccw(c3223.44,4131.99) 3195.94,4104.49 3270.94,4029.49 3271.38,4029.49 U1.5
  Top Layer w20: C11.2 Y1.2
OSC_OUT: C12.2 U1.6 Y1.1 | length 471.1
  Top Layer w10: Y1.1 3096.26,4059.06 3128.7,4091.49 cw(c3155.59,4064.6) 3182.48,4091.49 3185.47,4088.5 3250.04,4022.78 3250.25,4022.78 U1.6
  Top Layer w20: C12.2 Y1.1
PA0-WKUP: R8.2 U1.14 WKUP.2 | length 1976.9
  Top Layer w10: R8.2 cw(c2638.5,3135.05) 2640.94,3135.05 WKUP.2 2751.2,2978.09 cw(c2751.2,2935.34) 2793.94,2935.34 2793.94,2877.49 ccw(c2829.94,2877.49) 2829.94,2841.49 3043.94,2841.49 ccw(c3043.94,2874.49) 3076.94,2874.49 3076.94,3258.06 ; 3076.94,3258.09 cw(c3143.18,3258.06) 3096.34,3304.9 v1(3243.94,3452.49) ; U1.14 3269.4,3780.92 ccw(c3323.54,3835.06) 3323.51,3758.49 ; 3323.54,3758.49 v1(3428.94,3758.49)
  Bottom Layer w10: v1(3243.94,3452.49) 3407.74,3616.3 ccw(c3356.57,3667.47) 3428.94,3667.47 v1(3428.94,3758.49)
PA8: U1.41
PA11: U1.44
PA12: U1.45
PB0: U1.26
PB1: U1.27
PB2: U1.28
PB3: U1.55
PB4: U1.56
PB5: U1.57
PB6: U1.58
PB7: U1.59
PB8: U1.61
PB9: U1.62
PB10: U1.29
PB12: Ctrl.4 U1.33 | length 982.3
  Top Layer w10: U1.33 3712.32,3282.32 ccw(c3761.38,3331.38) 3761.38,3262 3900,3262 cw(c3900,3235.44) 3918.78,3254.22 4014,3159 cw(c3977.79,3122.79) 4029,3122.79 4029,3010 ccw(c4094.18,3010) 4048.07,2963.93 ; 4048.09,2963.91 4132,2880 Ctrl.4
PB13: Ctrl.3 U1.34 | length 895.2
  Top Layer w10: U1.34 3706.24,3316.24 ccw(c3767.18,3377.18) 3767.18,3291 3915,3291 cw(c3915,3254.79) 3940.61,3280.39 4040.15,3180.85 cw(c4004.3,3145) 4055,3145 4055,3090 ccw(c4108.11,3090) 4070.56,3052.44 Ctrl.3
PB14: Ctrl.2 U1.35 | length 826
  Top Layer w10: U1.35 3700.16,3350.16 ccw(c3768.15,3418.15) 3700.2,3350.12 ccw(c3768.15,3418.15) 3768.15,3322 3940,3322 cw(c3940,3288.2) 3963.89,3312.11 4065.15,3210.85 cw(c4029.3,3175) 4080,3175 4080,3152.92 ccw(c4132.92,3152.92) 4095.49,3115.51 4131,3080 Ctrl.2
PB15: Ctrl.1 U1.36 | length 741.8
  Top Layer w10: U1.36 3697.87,3380.29 ccw(c3768.58,3451) 3768.58,3351 3950,3351 cw(c3950,3297.89) 3987.55,3335.45 Ctrl.1
PC0: U1.8
PC4: U1.24
PC5: U1.25
PC8: U1.39
PC9: U1.40
PC13-TAMP: U1.2
SPI1_CLK: AD5541.2 U1.21 | length 1096.5
  Top Layer w10: U1.21 v1(3304.94,3703.93)
  Bottom Layer w10: AD5541.2 2441.87,3906.57 ccw(c2475.84,3940.54) 2475.83,3892.49 2481.37,3892.49 3151.94,3892.49 3304.94,3739.49 v1(3304.94,3703.93)
SPI1_CS: AD5541.3 U1.22 | length 1521.5
  Top Layer w10: AD5541.3 2407.94,4040.49 2439.94,4040.49 cw(c2439.94,4011.49) 2468.94,4011.49 2468.94,3614.49 ccw(c2506.94,3614.49) 2506.94,3576.49 v1(2879.94,3576.49) ; v1(3051.94,3576.49) 3072.44,3555.99 ccw(c3121.93,3605.49) 3121.93,3535.49 v1(3173.94,3535.49) ; U1.22 3290.82,3661.97 cw(c3318.64,3634.15) 3318.61,3673.49 ; 3318.64,3673.49 v1(3334.94,3673.49)
  Bottom Layer w10: v1(2879.94,3576.49) v1(3051.94,3576.49) ; v1(3173.94,3535.49) v1@3175.6,3535.49 ; v1@3175.63,3535.49 ccw(c3175.6,3587.01) 3212.03,3550.58 v1(3334.94,3673.49)
SPI1_SDA: AD5541.1 U1.23 | length 1428.6
  Top Layer w10: AD5541.1 2405.94,3581.61 ccw(c2448.05,3581.61) 2448.05,3539.49 2912.94,3539.49 v1(2915.94,3542.49) ; v1(3006.94,3544.49) 3032.97,3544.49 ; 3033,3544.49 cw(c3032.97,3503.52) 3061.94,3532.49 3073.94,3520.49 ccw(c3131.88,3578.44) 3131.79,3496.49 ccw(c3131.88,3578.44) 3131.88,3496.49 v1(3211.94,3496.49) ; U1.23 3299.45,3642.76 cw(c3311.3,3630.92) 3311.3,3647.67 3321.42,3647.67 cw(c3321.42,3613.53) 3345.56,3637.67 v1(3369.5,3613.73)
  Bottom Layer w10: v1(2915.94,3542.49) 3004.94,3542.49 v1(3006.94,3544.49) ; v1(3211.94,3496.49) 3234.46,3496.49 ccw(c3234.46,3539.46) 3234.53,3496.49 ccw(c3234.46,3539.46) 3264.85,3509.08 v1(3369.5,3613.73)
SPI3_CS: AD7175.4 U1.50 | length 579.2
  Top Layer w10: U1.50 U1.50@3713.24,3833.84 ; U1.50@3713.29,3833.84 4101.94,4222.49 AD7175.4
SPI3_MISO: AD7175.2 U1.52 | length 827.8
  Top Layer w10: U1.52 3971.94,4148.22 3971.94,4396.49 cw(c3997.94,4396.49) 3997.94,4422.49 AD7175.2
SPI3_MOSI: AD7175.1 U1.53 | length 936.5
  Top Layer w10: U1.53 3940.94,4145.06 3940.94,4493.49 cw(c3969.94,4493.49) 3969.94,4522.49 AD7175.1
SPI3_SCK: AD7175.3 U1.51 | length 712.9
  Top Layer w10: U1.51 4001.94,4150.38 4001.94,4284.49 cw(c4037.94,4284.49) 4037.94,4320.49 4103.94,4320.49 AD7175.3
SWCLK: SWD.2 U1.49 | length 1685.1
  Top Layer w10: U1.49 3820.71,3913.47 cw(c3861.81,3872.37) 3861.81,3930.49 v1(4044.94,3930.49)
  Bottom Layer w10: v1(4044.94,3930.49) 4240.94,3930.49 ccw(c4240.94,3968.49) 4278.94,3968.49 4278.94,4803.49 cw(c4303.94,4803.49) 4303.94,4828.49 4346.94,4828.49 ccw(c4346.94,4857.49) 4375.94,4857.49 SWD.2
SWDIO: SWD.3 U1.46 | length 2342
  Top Layer w10: U1.46 3734.35,3622.2 ccw(c3772.27,3660.12) 3772.26,3606.49 4239.94,3606.49 v1(4239.94,3607.49)
  Bottom Layer w10: v1(4239.94,3607.49) 4286.94,3607.49 ccw(c4286.94,3633.49) 4312.94,3633.49 4312.94,4480.49 ccw(c4312.94,4481.49) 4313.94,4481.49 4313.94,4504.49 cw(c4341.94,4504.49) 4341.94,4532.49 4390.94,4532.49 ccw(c4390.94,4567.49) 4425.94,4567.49 4425.94,4984.49 ccw(c4396.94,4984.49) 4396.94,5013.49 4300.94,5013.49 ccw(c4300.94,4988.49) 4275.94,4988.49 SWD.3
SYNC: AD7175.5 U1.54 | length 596.2
  Top Layer w10: U1.54 3685.64,3917.59 ccw(c3639.04,3964.2) 3704.94,3964.2 v1(3704.94,3991.49)
  Bottom Layer w10: v1(3704.94,3991.49) 3813.77,4100.32 cw(c3867.3,4046.78) 3867.24,4122.49 cw(c3867.3,4046.78) 3867.3,4122.49 AD7175.5
USART1_RX: U1.43 串口屏.2 | length 1325.6
  Top Layer w10: U1.43 3678.45,3594.58 ccw(c3707.63,3623.77) 3707.61,3582.49 ; 3707.63,3582.49 4207.51,3582.49 cw(c4207.51,3551) 4239,3551 4239,3413 ccw(c4272,3413) 4272,3380 4306,3380 cw(c4306,3346) 4340,3346 4340,3062 ccw(c4370,3062) 4370,3032 4449,3032 串口屏.2
USART1_TX: U1.42 串口屏.3 | length 1970.8
  Top Layer w10: U1.42 3668.06,3577.13 ccw(c3708.22,3617.29) 3708.22,3560.49 4160.51,3560.49 cw(c4160.51,3515) 4206,3515 4206,3372 ccw(c4233,3372) 4233,3345 4266,3345 cw(c4266,3306) 4305,3306 4305,2869 ccw(c4353,2869) 4353,2821 4484,2821 ccw(c4484,2881) 4544,2881 4544,3084.28 ccw(c4499.28,3084.28) 4499.28,3129 4454,3129 cw(c4454,3133) 串口屏.3
USART6_RX: D3.1 U1.38 | length 701.3
  Top Layer w10: U1.38 3513.04,3620.8 cw(c3533.44,3641.2) 3513.04,3661.59 3577.14,3725.7 cw(c3622.52,3680.32) 3622.52,3744.49 3878.08,3744.49 ccw(c3878.08,3762.35) 3895.94,3762.35 3895.94,3765.77 cw(c3912.58,3765.85) 3912.58,3782.49 D3.1
USART6_TX: R14.2 U1.37 | length 1153.6
  Top Layer w10: U1.37 3496.42,3609.58 cw(c3531.12,3644.28) 3496.42,3678.97 3561.56,3744.11 cw(c3605.94,3699.73) 3605.9,3762.49 ; 3605.94,3762.49 3839.94,3762.49 ccw(c3839.94,3787.49) 3864.94,3787.49 3864.94,3828.49 cw(c3885.94,3828.49) 3885.94,3849.49 4091.94,3849.49 cw(c4091.94,3824.49) 4116.94,3824.49 4116.94,3759.49 ccw(c4143.94,3759.49) 4143.94,3732.49 R14.2
VCC: C1.2 C2.2 C15.2 C16.2 C17.2 C18.2 U3.7 U4.7 U10.3 USB.2@3755.94,4957.49 VCC.1 串口屏.1 | length 5313.1
  Top Layer w20: U4.7 v1@3131.94,3442.49 ; v1(3089.94,3798.49) 3056.23,3798.49 3055.93,3798.19 3036.63,3798.19 U3.7 2985.94,3797.49 cw(c2985.94,3830.49) 2952.94,3830.49 2952.94,3883.37 ccw(c2858.5,3883.37) 2925.28,3950.16 2813.71,4061.72 cw(c2859.98,4107.99) 2813.71,4154.27 3088.14,4428.7 3088.21,4428.76 ccw(c2984.66,4532.31) 3131.1,4532.31 3131.1,4532.45 U10.3 C2.2 C1.2 VCC.1 3693.94,4572.49 ccw(c3693.94,4634.49) 3755.94,4634.49 USB.2@3755.94,4957.49
  Bottom Layer w20: C18.2 C17.2 ccw(c2961.94,3442.49) 2961.94,3441.49 3088.94,3441.49 ; C16.2 C15.2 2968.5,3852.49 3071.94,3852.49 cw(c3071.94,3834.49) 3089.94,3834.49 v1(3089.94,3798.49) 3089.94,3442.49 cw(c3088.94,3442.49) 3088.94,3441.49 ; 串口屏.1 4450,2726 cw(c4372.49,2726) 4372.49,2648.49 3234.48,2648.49 cw(c3234.48,2707.03) 3175.94,2707.03 3175.94,2707.16 3175.94,3395.4 ccw(c3129.85,3395.4) 3162.44,3427.99 3160.25,3430.18 ccw(c3132.94,3402.87) v1(3132.94,3441.49) 3089.94,3441.49 3088.94,3441.49
VCC_BOARD: D2.2 USB.1@3637.83,4957.49 | length 463.1
  Top Layer w20: D2.2 3593.94,5147.49 cw(c3593.94,5103.6) 3637.83,5103.6 3637.83,4958.6 USB.1@3637.83,4957.49
VCC_USB: USB.1@4504.09,4361.31 USB.3@3874.05,4957.49 | length 1175.5
  Top Layer w20: USB.3@3874.05,4957.49 3874.05,4839.38 ccw(c3925.94,4839.38) 3925.94,4787.49 4235.94,4787.49 cw(c4235.94,4747.49) 4275.94,4747.49 4275.94,4387.49 ccw(c4302.12,4387.49) 4302.12,4361.31 USB.1@4504.09,4361.31
VEE: C19.2 C20.2 C21.2 C22.2 D1.1 U3.4 U4.4 VEE.2 | length 3132.7
  Top Layer w20: v1(2530.94,4621.49) 2530.94,4673.49 cw(c2566.94,4673.49) 2566.94,4709.49 VEE.2 ccw(c2634.94,4710.49) 2635.94,4710.49 2635.94,4917.49 cw(c2687.36,4917.49) 2687.36,4968.91 D1.1 ; v1@2821.37,3288.49 U4.4 ; U3.4 2821.94,3697.49 v1(2821.94,3637.49)
  Bottom Layer w20: v1(2530.94,4621.49) 2530.94,4407.28 2530.94,4407.18 cw(c2486.26,4407.18) 2486.18,4362.49 2269.96,4362.49 ccw(c2269.88,4322.55) 2229.94,4322.55 2229.94,4322.41 2229.94,3691.35 2229.94,3691.21 ccw(c2283.66,3691.21) 2283.73,3637.49 v1(2821.94,3637.49) ; v1(2820.94,3288.49) ccw(c2820.94,3289.49) 2821.94,3289.49 2821.94,3324.35 ; C20.2 C19.2 2895.94,3694.49 2850.94,3694.49 ccw(c2850.94,3665.49) 2821.94,3665.49 v1(2821.94,3637.49) ; C22.2 C21.2 cw(c2899.94,3342.49) 2899.94,3341.49 2844.94,3341.49 ccw(c2844.94,3317.49) 2821.94,3324.35 ; 2821.94,3324.35 v1(2821.94,3637.49)
pads on no net: U1.1 U3.1 U3.5 U3.8 U4.1 U4.5 U4.8 U7.9 U7.10 U7.11 U7.12 U7.13 U7.14 U7.15 USB.4 USB.6 USB.MH1 USB.MH2
copper on no net:
  other v2: 2325.94,2727.49 4625.94,2727.49 2325.94,5077.49 4625.94,5077.49

## Polygon pours and split planes (outlines as drawn)
GND on Top Layer "GND_L01_P000" (solid, pour order 0): 2325.94,2597.49 cw(c2325.94,2727.49) 2195.94,2727.49 2195.94,5077.49 cw(c2325.94,5077.49) 2325.94,5207.49 4625.94,5207.49 cw(c4625.94,5077.49) 4755.94,5077.49 4755.94,2727.49 cw(c4625.94,2727.49) 4625.94,2597.49
GND on Bottom Layer "GND_L02_P001" (solid, pour order 1): 2325.94,2597.49 cw(c2325.94,2727.49) 2195.94,2727.49 2195.94,5077.49 cw(c2325.94,5077.49) 2325.94,5207.49 4625.94,5207.49 cw(c4625.94,5077.49) 4755.94,5077.49 4755.94,2727.49 cw(c4625.94,2727.49) 4625.94,2597.49

## Silkscreen, mask and mechanical layers (free items; w line width, h text height)
Top Overlay:
  text "3V3" at 4188.56,4824 h40 r90
  text "GND" at 4489.56,4810 h40 r90
  text "OP" at 3590,4802.89 h80
  text "SWDIO" at 4287.56,4768 h40 r90
  text "SWCLK" at 4388.56,4759 h40 r90
  text "8M" at 3334.69,4291.31 h40 r45
  text "12M" at 4257,3467 h40 r90
Bottom Overlay:
  drawing of 579 lines, arcs and shapes, not listed
  text "DIN" at 4062,4546 h30
  text "G" at 4258,4544.33 h30
  text "DOUT" at 4062,4439.33 h30
  text "G" at 4258,4439.33 h30
  text "SCLK" at 4062,4344.33 h30
  text "G" at 4258,4344.33 h30
  text "CS" at 4062,4253.33 h30
  text "G" at 4258,4253.33 h30
  text "SYNC" at 4062,4154.33 h30
  text "G" at 4258,4154.33 h30
  text "CS" at 2513,4031.33 h30
  text "G" at 2262,4030.33 h30
  text "CLK" at 2513,3936.33 h30
  text "G" at 2262,3932.33 h30
  text "SDA" at 2513,3834.33 h30
  text "G" at 2262,3832.33 h30
  text "GND" at 4398,3218.44 h40
  text "TX" at 4398,3117 h40
  text "RX" at 4394,3020 h40
  text "VCC" at 4393.96,2923.44 h40
  text "JLCJLCJLCJLC" at 3523.07,2608.44 h39.37
Bottom Solder:
  rectangle: 2200.32,3370.62 2415.32,3463.62
  rectangle: 2198,4794 2413,4887
Mechanical 1:
  lines w10: 2195.94,2727.49 ccw(c2325.94,2727.49) 2325.94,2597.49 4625.94,2597.49 ccw(c4625.94,2727.49) 4755.94,2727.49 4755.94,5077.49 ccw(c4625.94,5077.49) 4625.94,5207.49 2405.94,5207.49 2325.94,5207.49 ccw(c2325.94,5077.49) 2195.94,5077.49 2195.94,2727.49

## Text inside footprints (layer, text, board x,y; h text height)
Y2: Top Overlay "32.768k" at 3589.08,4228.71 h30 r45